# Altium PCB 智能灯.PcbDoc
Units mil, origin at the board's own origin, x right, y up, seen from the top; angles counter-clockwise.
Board outline 3937.01 x 3937.01 mil, 2 copper layers (Top Layer, Bottom Layer); 70 components, 42 nets, 334 pads, 4 vias.
Unrouted connection lines stored in the file: 1.
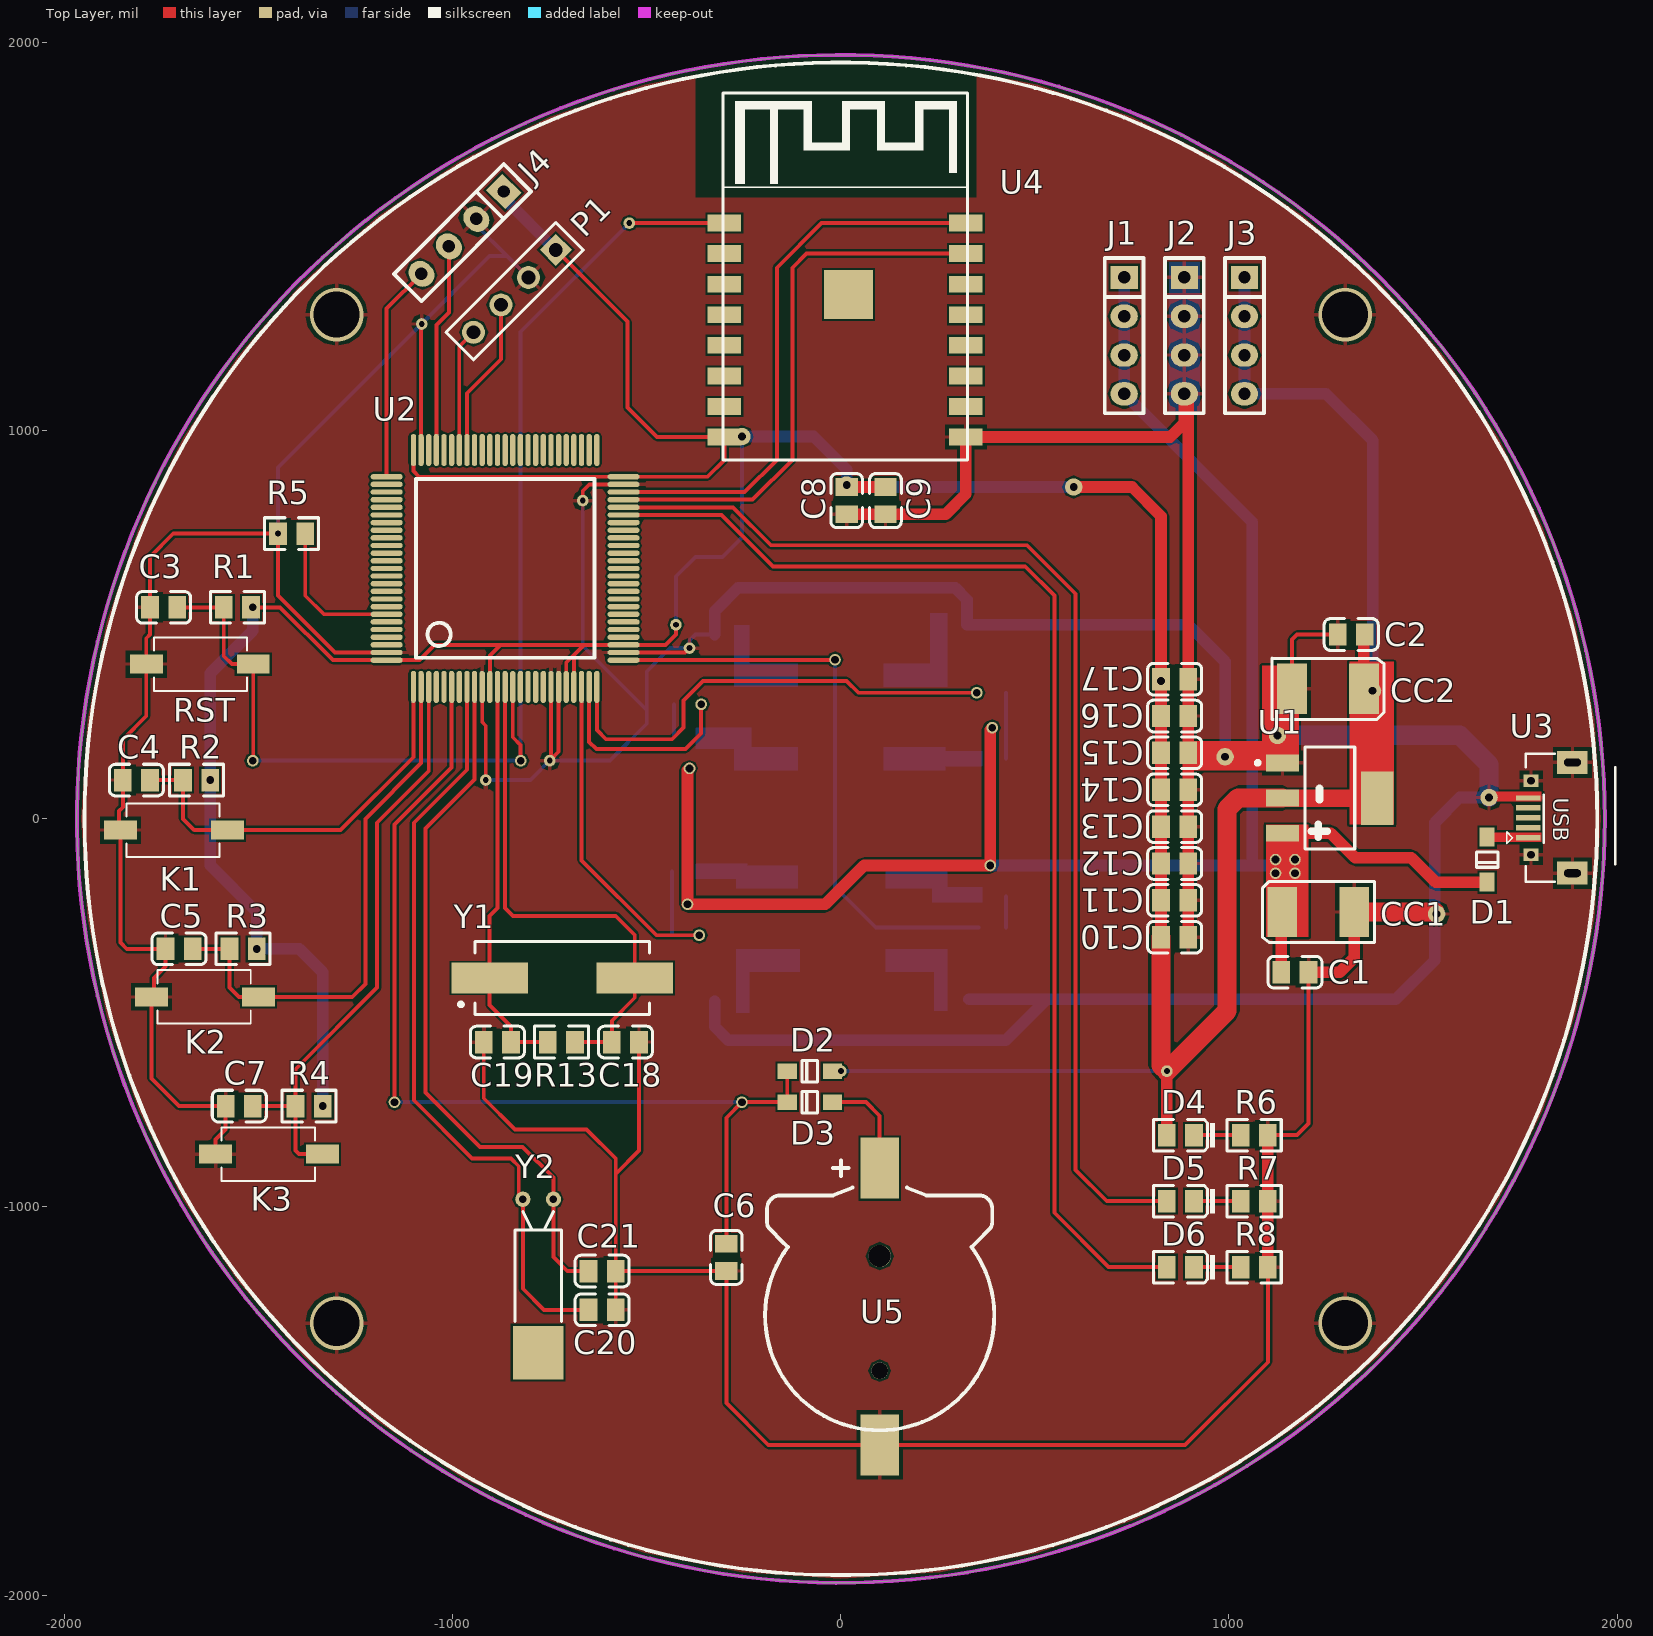
[diagram p0: Top Layer view]
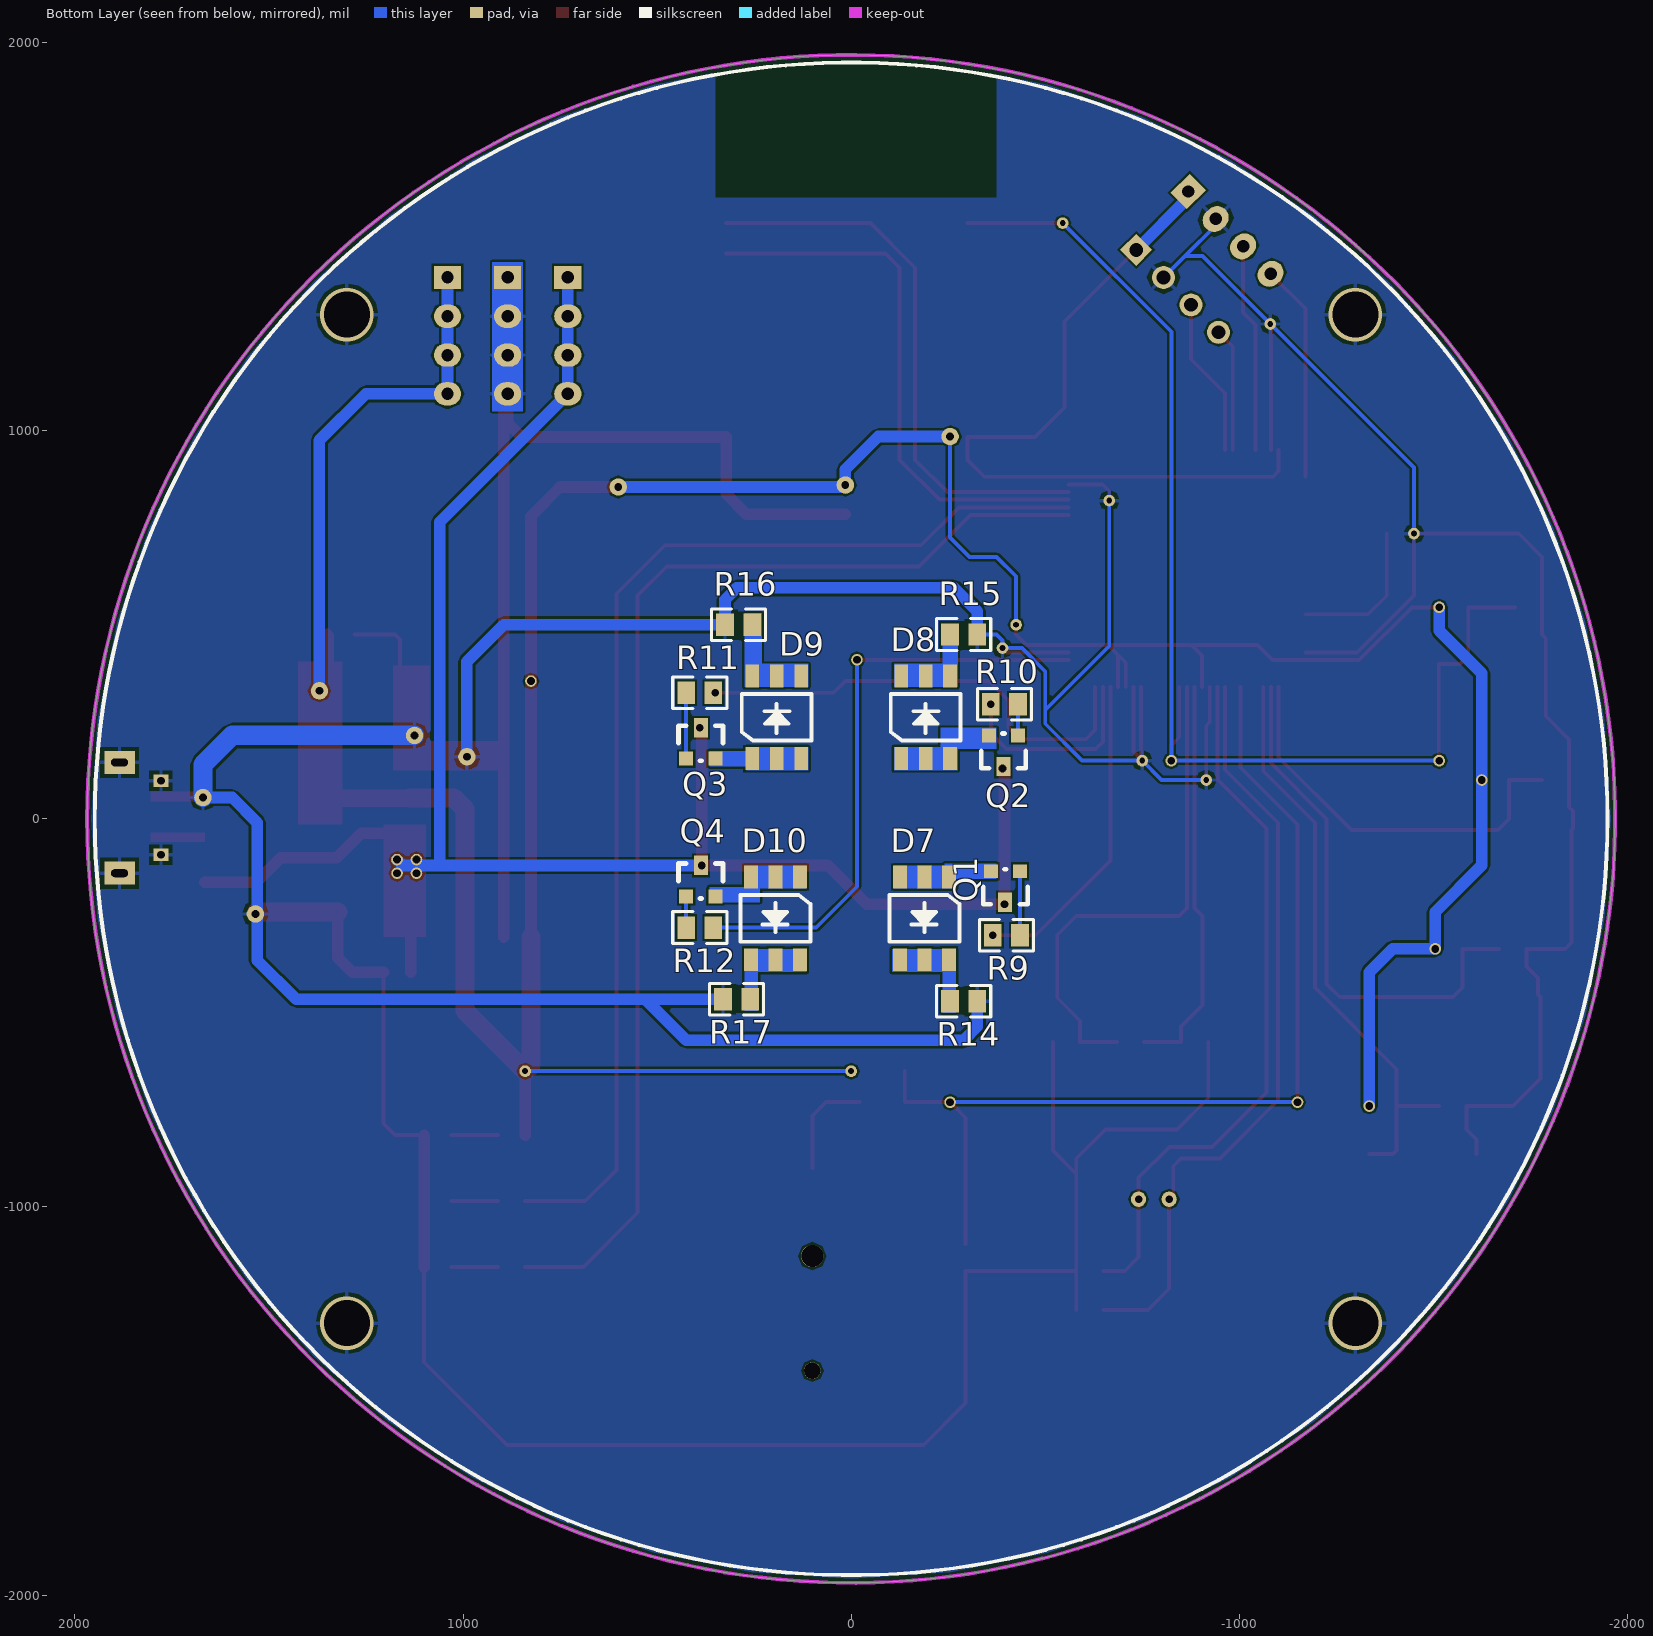
[diagram p1: Bottom Layer view, seen from below]

## Layer stack, top to bottom
Top Solder: solder mask 0.4, Solder Resist, Dk 3.5
Top Layer: signal copper 1.4
Dielectric 1: dielectric 12.6, FR-4, Dk 4.8
Bottom Layer: signal copper 1.4
Bottom Solder: solder mask 0.4, Solder Resist, Dk 3.5

## Board outline
-1968.5,0 ccw(c0,0) 0,-1968.5 ccw(c0,0) 1968.5,0 ccw(c0,0) 0,1968.5 ccw(c0,0)

## Design rules (kind name [scope] priority, off if disabled: settings)
Clearance [All] p1: gap=5
PolygonConnect [All] p1: connectstyle=Relief reliefconductorwidth=10 reliefentries=4 polygonreliefangle="90 Angle" airgapwidth=10
RoutingVias [All] p1: holewidth=28 width=50 viastyle="Through Hole" minholewidth=28 minwidth=50 maxholewidth=28 maxwidth=50
SolderMaskExpansion [All] p1: expansion=4
Width Width_2 [InNet('VUSB')] p1: maxlimit=50 minlimit=10 preferedwidth=30 minimp=50.000000 maximp=50.000000 favimp=50.000000
Width Width_1 [InNet('VCC3.3')] p2: maxlimit=50 minlimit=10 preferedwidth=10 minimp=50.000000 maximp=50.000000 favimp=50.000000
Width [InNet('GND')] p3: maxlimit=50 minlimit=10 preferedwidth=10 minimp=50.000000 maximp=50.000000 favimp=50.000000
30 further rules are at their usual default settings.

## Components (designator, comment, footprint, x,y, rotation, side; value= is the part's Value field where it differs from the comment)
C1 "104" LC-0805_C 1170,-395 r180 top
C2 "104" LC-0805_C 1315,475 r0 top
C3 "104" LC-0805_C -1745,545 r0 top
C4 "105" LC-0805_C -1815,100 r180 top
C5 "105" LC-0805_C -1705,-335 r180 top
C6 "225" LC-0805_C -295,-1130 r90 top
C7 "105" LC-0805_C -1549.96,-740 r180 top
C8 "10uF" LC-0805_C 15,820 r90 top
C9 "100nF" LC-0805_C 115,820 r90 top
C10 "104" LC-0805_C 860,-305 r180 top
C11 "104" LC-0805_C 860,-210 r180 top
C12 "104" LC-0805_C 860,-115 r180 top
C13 "104" LC-0805_C 860,-20 r180 top
C14 "104" LC-0805_C 860,75 r180 top
C15 "104" LC-0805_C 860,170 r180 top
C16 "104" LC-0805_C 860,265 r180 top
C17 "104" LC-0805_C 860,360 r180 top
C18 "22pF" LC-0805_C -555,-575 r180 top
C19 "22pF" LC-0805_C -885,-575 r180 top
C20 "22pF" LC-0805_C -615,-1265 r180 top
C21 "22pF" LC-0805_C -615,-1165 r0 top
CC1 "Cap Tan C" TAN-C-6032 1230,-240 r180 top
CC2 "Cap Tan C" TAN-C-6032 1255,335 r0 top
D1 "SS14" LC-SOD-123 1665,-105 r90 top
D2 "SS14" LC-SOD-123 -80,-650 r0 top
D3 "SS14" LC-SOD-123 -80,-730 r0 top
D4 "红灯 0805" LC-0805_LED_S1 875,-815 r180 top
D5 "蓝灯 0603" LC-0805_LED_S1 875,-985 r180 top
D6 "蓝灯 0603" LC-0805_LED_S1 875,-1155 r180 top
D7 "LED-5050" LED-5050W -253.86,-151.5 r270 bottom
D8 "LED-5050" LED-5050W -127,156.5 r90 bottom
D9 "LED-5050" LED-5050W 256.86,156.5 r90 bottom
D10 "LED-5050" LED-5050W 130,-151.5 r270 bottom
J1 "Pin HDR1X4" "Pin HDR1X4/2.54mm-S" 730,1395 r0 top
J2 "Pin HDR1X4" "Pin HDR1X4/2.54mm-S" 885,1395 r0 top
J3 "Pin HDR1X4" "Pin HDR1X4/2.54mm-S" 1040,1395 r0 top
J4 "Pin HDR1X4" "Pin HDR1X4/2.54mm-S" -868.58,1616.42 r315 top
K1 "KEY" KEY_2 -1710,-45 r180 top
K2 "KEY" KEY_2 -1630,-475 r180 top
K3 "KEY" KEY_2 -1465,-880 r180 top
P1 "Header 4" HDR1X4 -734.29,1465.71 r225 top
Q1 "NPN" SOT-23 -400,-170 r0 bottom
Q2 "NPN" SOT-23 -395,180 r0 bottom
Q3 "NPN" SOT-23 390,190 r180 bottom
Q4 "NPN" SOT-23 390,-165 r180 bottom
R1 "10KΩ" LC-0805_R -1555,545 r0 top
R2 "10KΩ" LC-0805_R -1660,100 r0 top
R3 "10KΩ" LC-0805_R -1540,-335 r0 top
R4 "10KΩ" LC-0805_R -1370,-740 r0 top
R5 "10KΩ" LC-0805_R -1415,735 r0 top
R6 "47KΩ" LC-0805_R 1065.04,-815 r0 top
R7 "47KΩ" LC-0805_R 1065.04,-985 r0 top
R8 "47KΩ" LC-0805_R 1065.04,-1155 r0 top
R9 "10KΩ" LC-0805_R -400,-300 r0 bottom
R10 "10KΩ" LC-0805_R -395,295 r0 bottom
R11 "10KΩ" LC-0805_R 390,325 r180 bottom
R12 "10KΩ" LC-0805_R 390,-280 r180 bottom
R13 "1MΩ" LC-0805_R -719.96,-575 r0 top
R14 "75Ω" LC-0805_R -290,-470 r180 bottom
R15 "75Ω" LC-0805_R -290,475 r180 bottom
R16 "75Ω" LC-0805_R 290,500 r0 bottom
R17 "75Ω" LC-0805_R 295,-465 r0 bottom
RST "RESET" KEY_2 -1660,415 r0 top
U1 "AMS1117" SOT-223 1265,65 r270 top
U2 "STM32F407VGT6" "LQFP100 14x14" -865,645 r0 top
U3 "USB" USB_B 1845,-122.28 r90 top
U4 "ESP-12S Module" "ESP-12S Module" 11.02,1259.41 r0 top
U5 "BAT" CR1220_A 100,-1280 r90 top
Y1 "8MHz" XTAL-SMD -905,-410 r0 top
Y2 "32.768KHz" OSC-3x8-WI-B -740.63,-980 r180 top

## Footprints (in the part's own frame and the unit in brackets; to place one, negate y for a bottom-side part, rotate by r counter-clockwise, add the part's x,y. Pads: shape width x height; smd on the part's side, far side on the other; paste and mask are expansions set on the pad)
CR1220_A [mm] "纽扣电池座"
  round 1.1 hole 1.1: 0(-3.6,0)
  round 1.45 hole 1.45: 0(3.9,0)
  rect 4x2.5 smd: 1(9.652,0) 2(-8.458,0)
  silkscreen extent -7.5,-7.5 10.16,7.5, body extent -9.42,-7.45 10.34,7.45, height 4.05
"ESP-12S Module" [mm]
  rect 2.2x1.1 smd: 1(-7.9,7) 2(-7.9,5) 3(-7.9,3) 4(-7.9,1) 5(-7.9,-1) 6(-7.9,-3) 7(-7.9,-5) 8(-7.9,-7) 9(7.9,-7) 10(7.9,-5) 11(7.9,-3) 12(7.9,-1) 13(7.9,1) 14(7.9,3) 15(7.9,5) 16(7.9,7)
  rect 3.2x3.2 smd: 17(0.22,2.321)
  silkscreen extent -8,-8.5 8,15.5
HDR1X4 [mm] "Connector; Header; 4 Position"
  rect 1.5x1.5 hole 0.9: 1(0,0)
  round 1.5 hole 0.9: 2(2.54,0) 3(5.08,0) 4(7.62,0)
  silkscreen extent -1.27,-1.27 8.89,1.27, body extent -1.27,-1.27 8.89,1.27, height 7.58
KEY_2 [mil] "贴片"
  rect 85x49.37 smd: 1(-129.57,-16.14) 2(146.02,-16.14)
  silkscreen extent -110,-85 130,53, body extent -110,-88 130,58
LC-0805_C [mm]
  rect 1.16x1.47 smd: 1(-0.89,0) 2(0.89,0)
  silkscreen extent -1.77,-1.04 1.77,1.04, body extent -1,-0.62 1,0.63, height 0.77
LC-0805_LED_S1 [mm]
  rect 1.16x1.47 smd: A(0.89,0) K(-0.89,0)
  silkscreen extent -2.25,-1.04 1.77,1.03, body extent -1.01,-0.62 1.01,0.62, height 1.1
LC-0805_R [mm]
  rect 1.16x1.47 smd: 1(-0.89,0) 2(0.89,0)
  silkscreen extent -1.77,-1.04 1.77,1.03, body extent -1,-0.62 1,0.63, height 0.49
LC-SOD-123 [mm]
  rect 1.25x1 smd: 1(1.475,0) 2(-1.475,0)
  silkscreen extent -0.5,-0.7 0.5,0.7, body extent -1.85,-0.77 1.85,0.78, height 1.35
LED-5050W [mil]
  rect 59.06x35.43 smd: 1(-1.5,-2) 2(211.5,-2) 3(-1.5,-65) 4(211.5,-65) 5(-1.5,-128) 6(211.5,-128)
  silkscreen extent 45,-155 165,25, body extent -1,-162 211,35, height 65
"LQFP100 14x14" [mm]
  oval 0.35x2.1 smd: 1(-6,-7.747) 2(-5.5,-7.747) 3(-5,-7.747) 4(-4.5,-7.747) 5(-4,-7.747) 6(-3.5,-7.747) 7(-3,-7.747) 8(-2.5,-7.747) 9(-2,-7.747) 10(-1.5,-7.747) 11(-1,-7.747) 12(-0.5,-7.747) 13(0,-7.747) 14(0.5,-7.747) 15(1,-7.747) 16(1.5,-7.747) 17(2,-7.747) 18(2.5,-7.747) 19(3,-7.747) 20(3.5,-7.747) 21(4,-7.747) 22(4.5,-7.747) 23(5,-7.747) 24(5.5,-7.747) 25(6,-7.747) 51(6,7.758) 52(5.5,7.758) 53(5,7.758) 54(4.5,7.758) 55(4,7.758) 56(3.5,7.758) 57(3,7.758) 58(2.5,7.758) 59(2,7.758) 60(1.5,7.758) 61(1,7.758) 62(0.5,7.758) 63(0,7.758) 64(-0.5,7.758) 65(-1,7.758) 66(-1.5,7.758) 67(-2,7.758) 68(-2.5,7.758) 69(-3,7.758) 70(-3.5,7.758) 71(-4,7.758) 72(-4.5,7.758) 73(-5,7.758) 74(-5.5,7.758) 75(-6,7.758)
  oval 2.1x0.35 smd: 26(7.752,-5.994) 27(7.752,-5.494) 28(7.752,-4.994) 29(7.752,-4.494) 30(7.752,-3.994) 31(7.752,-3.494) 32(7.752,-2.994) 33(7.752,-2.494) 34(7.752,-1.994) 35(7.752,-1.494) 36(7.752,-0.994) 37(7.752,-0.494) 38(7.752,0.006) 39(7.752,0.506) 40(7.752,1.006) 41(7.752,1.506) 42(7.752,2.006) 43(7.752,2.506) 44(7.752,3.006) 45(7.752,3.506) 46(7.752,4.006) 47(7.752,4.506) 48(7.752,5.006) 49(7.752,5.506) 50(7.752,6.006) 76(-7.752,6.006) 77(-7.752,5.506) 78(-7.752,5.006) 79(-7.752,4.506) 80(-7.752,4.006) 81(-7.752,3.506) 82(-7.752,3.006) 83(-7.752,2.506) 84(-7.752,2.006) 85(-7.752,1.506) 86(-7.752,1.006) 87(-7.752,0.506) 88(-7.752,0.006) 89(-7.752,-0.494) 90(-7.752,-0.994) 91(-7.752,-1.494) 92(-7.752,-1.994) 93(-7.752,-2.494) 94(-7.752,-2.994) 95(-7.752,-3.494) 96(-7.752,-3.994) 97(-7.752,-4.494) 98(-7.752,-4.994) 99(-7.752,-5.494) 100(-7.752,-5.994)
  silkscreen extent -5.84,-5.84 5.84,5.85, body extent -8,-7.98 8,8.03, height 1.45
OSC-3x8-WI-B [mm]
  rect 3.3x3.5 smd: 0(1,10.033)
  round 1 hole 0.5: 1(0,0) 2(2,0)
  silkscreen extent -0.52,0.8 2.52,8, body extent -0.48,-0.13 2.52,10.05, height 3.03
"Pin HDR1X4/2.54mm-S" [mil]
  rect 70x60 hole 32: 1(0,0)
  oval 70x60 hole 32: 2(0,-100) 3(0,-200) 4(0,-300)
  silkscreen extent -50,-350 50,50, body extent -50,-350 50,50, height 336
SOT-23 [mil]
  rect 36x36 smd: B(-35,-35) E(40,-35)
  rect 36x50 smd: C(3,45)
  silkscreen extent -55,-40 60,50, body extent -54,-48 60,62, height 47
SOT-223 [mm] "ASM1117系列"
  rect 1.1x2.15 smd: 1(-2.012,-3.227) 2(0.288,-3.227) 3(2.588,-3.227)
  rect 3.5x2.15 smd: 2(0.288,2.973)
  silkscreen extent -3.06,-4.98 3.64,1.5, body extent -3,-3.48 3.5,3.48, height 1.7
TAN-C-6032 [mm]
  rect 1.95x3.3 smd: 1(-2.35,0) 2(2.35,0)
  silkscreen extent -3.68,-2.01 3.66,2, body extent -3,-1.6 3,1.6, height 2.6
USB_B [mm]
  rect 0.35x1.6 smd: 1(1.875,1.884) 2(2.525,1.884) 3(3.175,1.884) 4(3.825,1.884) 5(4.475,1.884)
  rect 1.5x2 hole 0.5 slot 1.1 at 90 deg: 5(-0.45,-1.016) 5(6.8,-1.016)
  rect 0.8x1 hole 0.5: 5(0.75,1.694) 5(5.6,1.694)
  silkscreen extent -1.02,-3.81 7.37,3.28, body extent -0.83,-3.73 7.18,1.87, height 2.8
XTAL-SMD [mm]
  rect 5x2 smd: 1(0,0) 2(9.5,0)
  silkscreen extent -2,-2.4 10.45,2.4, body extent -1.95,-2.46 11.45,2.44, height 4

## Part data
C1 C2 C4 C5 C6 C7 C8 C9 C10 C11 C12 C13 C14 C15 C16 C17: library part "0805 6.8nF (682) 10% 50V", "贴片电容"
C3: library part "0805 330nF (334) 10% 50V", "贴片电容"
C18 C19 C20 C21: library part "0805 6pF (6R0) 0.25pF 50V", "贴片电容"
CC1 CC2: "Polarized Capacitor (Radial)"
D1 D2 D3: library part D
D4: library part "0805 红灯", "发光二极管"
D5 D6: library part "0603 蓝灯", "发光二极管"
K1 K2 K3: "微动开关"
P1: "Header, 4-Pin"
Q1 Q2 Q3 Q4: "NPN三极管"
R1 R13: library part "0805 390KΩ (3903) 1%", "贴片电阻"
R2 R3 R4 R6 R7 R8 R9 R10 R11 R12: library part "0805 11KΩ (1102) 1%", "贴片电阻"
R5: library part "0805 1.8KΩ (1801) 1%", "贴片电阻"
R14 R15 R16 R17: library part "0805 1.2KΩ (1201) 1%", "贴片电阻"
RST: library part KEY, "微动开关"
U1: "3.3V电压转换器AMS1117"
U2: library part STM32F103VBT6
U5: "纽扣电池座CR1220"
Y1 Y2: library part XTAL, "晶体振荡器"

## Free pads (board coordinates)
  round 30 hole 20: 2(-1625,100) 2(-1515,150) 2(-1515,545) 2(-1505,-335) 2(-1334.96,-740) 2(-1150,-730) 2(-825,150) 2(-395,-220) 2(-390,130) 2(-365,-300) 2(-360,295) 2(-255,-730) 2(-15,410) 2(350,325) 2(385,-120) 2(390,235) 2(825,355) 2(1120,-140) 2(1120,-105) 2(1170,-140) 2(1170,-105)
  round 30 hole 15: 2(-1450.04,735) 2(-1080,1275) 2(-915,100) 2(-750,150) 2(-665,820) 2(-545,1535) 2(-425,500) 2(-390,440) 2(0,-650) 2(840,-650)
  round 45 hole 20: 2(-255,985) 2(15,860) 2(600,855) 2(990,160) 2(1125,215) 2(1370,330) 2(1535,-245) 2(1670,55)

## Via types
v1: diameter 137.8, hole 118.11, Top Layer to Bottom Layer, 4 vias

## Nets (pads, with @x,y where several pads share a name; then routed paths per layer and width w, separated by ;. In a path a pad name is that pad's centre, name@x,y a point inside that pad or via, vN(x,y) a via of type N, cw(c..) or ccw(c..) an arc to the next point about the centre after c; other vN are vias at no path point)
DS1: pad.2@-365,-300 R9.2 U2.23 | length 830
  Top Layer w10: U2.23 -668.15,-106.85 -475,-300 pad.2@-365,-300
DS2: pad.2@-360,295 R10.2 U2.24 | length 529.2
  Top Layer w10: U2.24 -648.46,198.46 -630,180 -400,180 -360,220 pad.2@-360,295
DS3: pad.2@350,325 R11.2 U2.25 | length 1215.4
  Top Layer w10: U2.25 -628.78,228.78 -605,205 -435,205 -405,235 -405,305 -355,355 15,355 45,325 pad.2@350,325
DS4: pad.2@-15,410 R12.2 U2.26 | length 1543.2
  Top Layer w10: U2.26 pad.2@-15,409
  Bottom Layer w10: pad.2@-15,410 -15,-175 90,-280 R12.2
GND: C1.1 C2.1 C3.1 C4.2 C5.2 C6.1 C7.2 C8.1 C9.1 C10.1 C11.1 C12.1 C13.1 C14.1 C15.1 C16.1 C17.1 C18.1 C19.2 C20.1 C21.2 CC1.1 CC2.1 J2.1 J2.2 J2.3 J2.4 J4.2 K1.2 K2.2 K3.2 P1.2 pad.2@990,160 pad.2@1125,215 pad.2@1535,-245 pad.2@1670,55 pad.2@-390,440 pad.2@-665,820 pad.2@-750,150 pad.2@-915,100 pad.2@-1080,1275 pad.2@-1450.04,735 R5.1 R6.2 R7.2 R8.2 R14.2 R15.2 R16.2 R17.2 RST.1 U1.1 U2.10 U2.19 U2.20 U2.27 U2.49 U2.74 U2.99 U3.5 U4.9 U4.17 U5.2 | length 19575.1
  Top Layer w10: K3.2 -1611.02,-826.02 -1585,-800 C7.2 -1705,-740 -1776.02,-668.98 K2.2 -1770,-452.83 -1770,-410 -1740.04,-380.04 C5.2 -1840,-335 -1856.02,-318.98 K1.2 -1860,-24.88 -1860,20 -1850.04,29.96 C4.2 -1850.04,204.96 -1789.57,265.43 RST.1 -1789.57,465.43 -1780.04,474.96 C3.1 -1780.04,674.96 -1720,735 R5.1 -1450.04,575.04 -1303.69,428.69 U2.99 ; U2.74 -1081.54,1273.46 pad.2@-1080,1275 ; U2.10 -924.06,249.06 -915,240 pad.2@-915,100 ; C19.2 -920.04,-719.96 -840,-800 -655,-800 -579.96,-875.04 -579.96,-914.96 ; pad.2@-750,150 pad.2@-746.89,153.11 ; U2.19 pad.2@-746.89,153.11 ; U2.20 -727.2,172.8 pad.2@-746.89,153.11 ; pad.2@-665,820 -665,845 -648.24,861.76 U2.49 ; C20.1 C21.2 ; U2.27 -401.31,428.69 pad.2@-390,440 ; C18.1 -519.96,-854.96 -579.96,-914.96 ; R8.2 1100.08,-1399.92 887,-1613 U5.2 -187,-1613 -295,-1505 C6.1 C6.1 C21.2 ; R6.2 1175,-815 1205.04,-784.96 C1.1 ; CC2.1 1162.48,462.48 1175,475 C2.1 ; C21.2 -579.96,-914.96
  Top Layer w30: C8.1 C9.1 269.96,784.96 322.05,837.05 U4.9 848.82,983.82 885,1020 J2.4 895.04,1084.96 C17.1 C16.1 C15.1 C14.1 C13.1 C12.1 C11.1 C10.1 ; R8.2 R7.2 R6.2 ; C1.1 1285,-395 1322.52,-357.48 CC1.1 ; pad.2@1530,-240 pad.2@1535,-245
  Top Layer w50: CC1.1 pad.2@1530,-240
  Bottom Layer w10: pad.2@-1450.04,735 -1450.04,904.96 -1080,1275 -905,1450 -860,1450 ; J4.2 -939.29,1529.29 -860,1450 ; pad.2@-915,100 -800,100 -750,150 -595,150 -500,245 -500,280 ; P1.2 -860,1450 ; pad.2@-665,820 -665,445 -500,280 ; R15.2 -375,475 -390,460 -390,440 -440,440 -500,380 -500,280
  Bottom Layer w30: R14.2 -325.04,-534.96 -290,-570 425,-570 530,-465 ; R15.2 -325.04,534.96 -265,595 295,595 325.04,564.96 R16.2 895,500 990,405 pad.2@990,160 ; R17.2 530,-465 ; pad.2@1670,55 1595,55 1530,-10 1530,-365 1430,-465 530,-465
  Bottom Layer w50: pad.2@1125,215 1595,215 1670,140 pad.2@1670,55
  other v1: -1299.21,-1299.21 1299.21,-1299.21 -1299.21,1299.21 1299.21,1299.21
KEY1: C4.1 K1.1 R2.1 U2.1 | length 1049.6
  Top Layer w10: C4.1 R2.1 -1695.04,0.04 -1666.14,-28.86 K1.1 -1288.86,-28.86 -1101.22,158.78 U2.1
KEY2: C5.1 K2.1 R3.1 U2.2 | length 1393.3
  Top Layer w10: C5.1 R3.1 -1575.04,-434.96 -1551.14,-458.86 K2.1 -1258.86,-458.86 -1225,-425 -1225,0 -1081.54,143.46 U2.2
KEY3: C7.1 K3.1 R4.1 U2.3 | length 1520.3
  Top Layer w10: C7.1 R4.1 ; K3.1 -1396.14,-863.86 -1405.04,-854.96 R4.1 ; U2.3 -1061.85,123.15 -1195,-10 -1195,-435 -1405.04,-645.04 R4.1
LED1: D5.A U2.46 | length 3010.1
  Top Layer w10: U2.46 -277.7,802.7 -180,705 480,705 605,580 605,-905 685,-985 D5.A
LED2: D6.A U2.45 | length 3133.9
  Top Layer w10: U2.45 -308.02,783.02 -175,650 475,650 550,575 550,-1015 690,-1155 D6.A
NetD1_1: D1.1 U3.1
NetD3_1: D3.1 U5.1 | length 271.4
  Top Layer w10: D3.1 65,-730 100,-765 U5.1
NetD4_K: D4.K R6.1 | length 120
  Top Layer w10: D4.K R6.1
NetD5_K: D5.K R7.1 | length 120
  Top Layer w10: D5.K R7.1
NetD6_K: D6.K R8.1 | length 120
  Top Layer w10: D6.K R8.1
NetD7_1: D7.1 D7.3 D7.5 Q1.E
NetD7_2: D7.2 D7.4 D7.6 R14.1
NetD8_1: D8.1 D8.3 D8.5 Q2.E
NetD8_2: D8.2 D8.4 D8.6 R15.1
NetD9_1: D9.1 D9.3 D9.5 Q3.E
NetD9_2: D9.2 D9.4 D9.6 R16.1
NetD10_1: D10.1 D10.3 D10.5 Q4.E
NetD10_2: D10.2 D10.4 D10.6 R17.1
NetQ1_B: Q1.B R9.1 | length 165
  Bottom Layer w10: R9.1 R9.1 Q1.B
NetQ2_B: Q2.B R10.1 | length 80
  Bottom Layer w10: R10.1 Q2.B Q2.B
NetQ3_B: Q3.B R11.1 | length 170
  Bottom Layer w10: Q3.B Q3.B R11.1
NetQ4_B: Q4.B R12.1 | length 80
  Bottom Layer w10: Q4.B R12.1 R12.1
NetR5_2: R5.2 U2.94 | length 389.6
  Top Layer w10: R5.2 -1379.96,574.96 -1332.11,527.11 U2.94
NRST: C3.2 pad.2@-545,1535 pad.2@-825,150 pad.2@-1515,150 R1.1 RST.2 U2.14 U4.1 | length 3213.4
  Top Layer w10: C3.2 R1.1 -1590.04,420.04 -1568.86,398.86 RST.2 -1513.98,151.02 pad.2@-1515,150 ; U2.14 -845.31,210.31 -825,190 pad.2@-825,150 ; pad.2@-545,1535 U4.1
  Bottom Layer w10: pad.2@-1515,150 -825,150 -825,1255 pad.2@-545,1535
OSC32_IN: C20.2 U2.8 Y2.2 | length 1973.9
  Top Layer w10: U2.8 -963.43,126.57 -1100,-10 -1100,-725 -950,-875 -850,-875 -830,-895 -830,-969.37 Y2.2 -819.37,-1210.63 -765,-1265 C20.2
OSC32_OUT: C21.1 U2.9 Y2.1 | length 1828.2
  Top Layer w10: U2.9 -943.74,101.89 -943.43,101.57 -1070,-25 -1070,-705 -930,-845 -820,-845 -740.63,-924.37 Y2.1 -740.63,-1129.37 -705,-1165 C21.1
OSC_IN: C19.1 R13.1 U2.12 Y1.1 | length 1041.2
  Top Layer w10: U2.12 -884.69,-229.69 -905,-250 Y1.1 -905,-480 -849.96,-535.04 C19.1 R13.1
OSC_OUT: C18.2 R13.2 U2.13 Y1.2 | length 1327.9
  Top Layer w10: U2.13 -865,-230 -845,-250 -580,-250 -530.99,-299.01 Y1.2 -530.99,-460.99 -590.04,-520.04 C18.2 R13.2
SWCLK: J4.4 U2.76 | length 559.9
  Top Layer w10: U2.76 -1170.21,1314.79 J4.4
SWDIO: J4.3 U2.72 | length 537.9
  Top Layer w10: U2.72 -1042.17,1272.83 -1010,1305 J4.3
U1_RX: P1.4 U2.69 | length 318.3
  Top Layer w10: U2.69 -983.11,1216.89 P1.4
U1_TX: P1.3 U2.68 | length 410.2
  Top Layer w10: U2.68 -963.43,1096.57 -875.71,1184.29 P1.3
U3_RX: U2.48 U4.16 | length 1458.8
  Top Layer w10: U2.48 -247.93,842.07 -165,925 -165,1420 -50,1535 U4.16
U3_TX: U2.47 U4.15 | length 1434.4
  Top Layer w10: U2.47 -227.61,822.39 -125,925 -125,1420 -88.74,1456.26 U4.15
VBAT: C6.2 D2.2 D3.2 pad.2@-255,-730 pad.2@-1150,-730 U2.6 | length 2589.4
  Top Layer w10: pad.2@-1150,-730 -1150,-15 -1002.8,132.2 U2.6 ; C6.2 -295,-770 -255,-730 D3.2 D2.2
  Bottom Layer w10: -1135,-730 pad.2@-255,-730
VCC3.3: C2.2 C8.2 C9.2 C10.2 C11.2 C12.2 C13.2 C14.2 C15.2 C16.2 C17.2 CC2.2 D2.1 D4.A J3.1 J3.2 J3.3 J3.4 J4.1 P1.1 pad.2@0,-650 pad.2@15,860 pad.2@600,855 pad.2@825,355 pad.2@840,-650 pad.2@1370,330 pad.2@-255,985 pad.2@-425,500 pad.2@-1334.96,-740 pad.2@-1505,-335 pad.2@-1515,545 pad.2@-1625,100 R1.2 R2.2 R3.2 R4.2 U1.2 U2.11 U2.21 U2.22 U2.28 U2.50 U2.75 U2.100 U4.8 | length 11642.3
  Top Layer w10: R1.2 -1445,545 -1309,409 U2.100 -1086,409 -1046.63,448.37 -876.63,448.37 ; U2.75 -1101.22,896.22 -1086.44,881.44 U2.50 -343.56,881.44 -300,925 U4.8 -473.82,983.82 -550,1060 -550,1281.42 P1.1 ; U2.11 -904.37,420.63 -876.63,448.37 ; U2.21 -707.52,402.48 -687.83,422.17 ; U2.22 -687.83,422.17 ; pad.2@-425,500 -425,475 -451.63,448.37 U2.28 -661.63,448.37 ; -876.63,448.37 -661.63,448.37 ; -687.83,422.17 -661.63,448.37
  Top Layer w30: C8.2 C9.2 ; pad.2@600,855 750,855 824.96,780.04 C17.2 C16.2 C15.2 C14.2 C13.2 C12.2 C11.2 C10.2 ; D4.A 839.96,-650.04 pad.2@840,-650 ; CC2.2 1347.52,472.48 C2.2
  Top Layer w50: C10.2 824.96,-635.04 pad.2@839.96,-650.04 ; pad.2@840,-650 995,-495 995,25 1023.66,53.66 U1.2@1137.95,53.66
  Bottom Layer w10: pad.2@-425,500 -425,625 -375,675 -305,675 -255,725 pad.2@-255,985 ; pad.2@0,-650 pad.2@840,-650
  Bottom Layer w30: pad.2@-1515,545 -1515,485 -1625,375 -1625,100 -1625,-120 -1505,-240 -1505,-335 -1395,-335 -1334.96,-395.04 pad.2@-1334.96,-740 ; J4.1 -868.58,1600 P1.1 ; pad.2@-255,985 -70,985 15,900 15,860 20,855 pad.2@600,855 ; J3.1 J3.2 J3.3 J3.4 1250,1095 1370,975 pad.2@1370,330
VUSB: C1.2 CC1.2 D1.2 J1.1 J1.2 J1.3 J1.4 pad.2@385,-120 pad.2@390,235 pad.2@1120,-105 pad.2@1120,-140 pad.2@1170,-105 pad.2@1170,-140 pad.2@-390,130 pad.2@-395,-220 Q1.C Q2.C Q3.C Q4.C U1.3 | length 4910.1
  Top Layer w30: pad.2@-390,130 -395,125 -395,-220 -40,-220 60,-120 385,-120 385,230 pad.2@390,235 ; C1.2 1134.96,-242.52 CC1.2 1137.48,-37.36 U1.3 1261.89,-36.89 1325,-100 1470,-100 1533.07,-163.07 D1.2
  Bottom Layer w30: Q4.C 1060,-120 ; J1.1 J1.2 J1.3 J1.4 1060,765 1060,-120 ; pad.2@1170,-105 1155,-120 1060,-120
pads on no net: U2.4 U2.5 U2.7 U2.15 U2.16 U2.17 U2.18 U2.29 U2.30 U2.31 U2.32 U2.33 U2.34 U2.35 U2.36 U2.37 U2.38 U2.39 U2.40 U2.41 U2.42 U2.43 U2.44 U2.51 U2.52 U2.53 U2.54 U2.55 U2.56 U2.57 U2.58 U2.59 U2.60 U2.61 U2.62 U2.63 U2.64 U2.65 U2.66 U2.67 U2.70 U2.71 U2.73 U2.77 U2.78 U2.79 U2.80 U2.81 U2.82 U2.83 U2.84 U2.85 U2.86 U2.87 U2.88 U2.89 U2.90 U2.91 U2.92 U2.93 U2.95 U2.96 U2.97 U2.98 U3.2 U3.3 U3.4 U4.2 U4.3 U4.4 U4.5 U4.6 U4.7 U4.10 U4.11 U4.12 U4.13 U4.14 U5.0 Y2.0

## Polygon pours and split planes (outlines as drawn)
GND on Top Layer "NONET_L-01_P-001" (solid, remove dead copper, pour order 0): -1230,1540 -1400,1370 -1420,1370 -1438.63,1343.63 -1495,1275 -1570,1185 -1700,985 -1745,915 -1815.62,760.62 -1870,615 -1895,532.9 -1940,330 -1947.2,288.84 -1965,95 -1965,-115 -1913.23,-463.23 -1895,-535 -1831.05,-698.95 -1790,-815 -1745,-911.03 -1675,-1035 -1640,-1095 -1495,-1280 -1325.4,-1455.44 -1142.26,-1607.22 -1105,-1630 -917.6,-1744.58 -815,-1790 -719.02,-1832.49 -620,-1870 -535.82,-1894.18 -370,-1935 -325.24,-1941.45 -137.48,-1968.5 50,-1970 400.48,-1930.94 490,-1905 640.48,-1861.4 760,-1815 872.36,-1764.65 1020,-1680 1078.55,-1646.74 1345,-1440 1513.47,-1258.73 1530,-1235 1659.69,-1064.83 1700,-990 1776.36,-848.26 1825,-730 1870.46,-613.51 1925,-420 1931.42,-380.28 1965,10 1931.42,380.28 1920,450 1860.39,643.4 1810,780 1756.67,888.32 1635,1100 1604.87,1139.91 1360,1425 1078.55,1653.55 1005,1695 860.65,1776.36 785,1810 710.87,1842.97 625,1870 560.59,1886.99 465,1915 400.49,1927.33 210,1960 205,1965 -160,1965 -410.36,1931.17 -480,1910 -644.95,1859.85 -750,1820 -848.26,1776.36 -970,1715
GND on Bottom Layer "NONET_L-01_P-001" (solid, remove dead copper, pour order 4): 5,1970 0.54,1965.54 -74.8,1965.54 -164.46,1965.54 -170,1960 -195,1960 -270,1950 -320,1940 -345,1940 -365.93,1933.03 -425,1925 -475,1910 -495,1910 -510.32,1901.2 -555,1895 -574.35,1882.85 -595,1880 -610.47,1871.45 -640,1865 -658.77,1855 -670,1855 -691.19,1843.17 -710,1835 -740.69,1820.69 -765,1815 -795.31,1800.69 -830,1790 -854.9,1774.9 -900,1750 -930.07,1734.93 -950,1725 -965,1725 -985,1705 -1010,1680 -1025,1680 -1040,1680 -1055,1665 -1075,1645 -1085,1645 -1100,1645 -1120,1625 -1140,1605 -1155,1605 -1175,1585 -1195,1565 -1200,1565 -1205,1565 -1230,1540 -1270,1500 -1280,1500 -1285,1500 -1360,1425 -1480,1305 -1515,1250 -1540,1220 -1555,1205 -1629.39,1104.58 -1650,1075 -1710.06,975.04 -1735,930 -1777.4,852.4 -1795,810 -1825.98,735.39 -1850,675 -1874.76,600.24 -1905,500 -1915.19,455.04 -1935,350 -1945.5,300.08 -1965,160 -1970,155 -1970,-75 -1935,-350 -1925,-405 -1874.85,-599.95 -1840,-695 -1809.6,-774.83 -1775,-850 -1717.7,-961.51 -1605,-1140 -1575.63,-1180 -1345,-1440 -1190.51,-1567.71 -1165,-1585 -1015.73,-1686.21 -970,-1715 -841.93,-1775.36 -760,-1815 -708.33,-1840 -640,-1860 -580,-1881.12 -475,-1910 -425,-1925 -285,-1950 -264.41,-1950.66 5,-1968.5 276.64,-1950 292.01,-1950 310,-1945 375.07,-1935.25 405,-1925 499.16,-1904.16 555,-1885 644.52,-1860 700,-1840 756.9,-1817.17 810,-1795 850.36,-1775.36 915,-1745 939.82,-1729.67 995,-1695 1034.75,-1674.6 1130,-1610 1167.38,-1585 1325,-1460 1575.63,-1180 1600,-1140 1659.1,-1059.43 1675,-1030 1733.19,-933.19 1765,-870 1797.67,-797.67 1830,-720 1852.04,-667.04 1880,-565 1899.95,-514.95 1920,-435 1929.5,-389.9 1960,-170 1960,220 1955,225 1920,434.29 1910,485 1864.97,629.99 1835,720 1781.79,836.79 1695,1000 1659.1,1059.43 1490,1285 1290,1485 1290,1495 1045,1668.23 970,1715 795.31,1800.69 670,1850 485,1910 249.69,1952.6 24.28,1965.54

## Keep-outs
Keep-Out Layer:
  circle w10: c0,0 r1968.5

## Other copper
Top Layer:
  rectangle net GND: 880,125 1180,200
  rectangle net GND: 1660,45 1805,70
  rectangle net GND: 1085,125 1180,395
  rectangle net VCC3.3: 1310,-15 1425,405
  rectangle net VCC3.3: 1095,30 1425,75
  rectangle net VUSB: 1095,-305 1205,-15
  rectangle net NetD1_1: 1665,-60 1805,-35
  pour cut-out: -375,1910 -375,1600 350,1600 350,1915 295,1925 40,1950 -209.74,1938.49 -230,1935
Bottom Layer:
  rectangle net NetD8_2: -275,340 -235,500
  rectangle net NetD7_2: -270,-500 -235,-335
  rectangle net NetD10_2: 240,-495 275,-335
  rectangle net NetD8_2: -270,340 -110,400
  rectangle net NetD8_1: -275,125 -110,185
  rectangle net NetD7_2: -270,-395 -105,-335
  rectangle net NetD7_1: -270,-180 -110,-120
  rectangle net NetD10_1: 115,-180 275,-120
  rectangle net NetD10_2: 115,-395 275,-335
  rectangle net NetD9_2: 230,340 275,530
  rectangle net NetD9_2: 110,340 275,400
  rectangle net NetD9_1: 240,135 365,175
  rectangle net NetD9_1: 110,125 270,185
  rectangle net GND: 845,1050 925,1435
  rectangle net NetD10_1: 235,-215 365,-175
  rectangle net NetD7_1: -375,-155 -240,-115
  rectangle net NetD8_1: -375,180 -230,235
  pour cut-out: -375,1930 -375,1600 350,1600 350,1940 279.79,1948.52 234.93,1954.43 30,1968.5 -179.59,1962.57 -195,1960

## Silkscreen, mask and mechanical layers (free items; w line width, h text height)
Top Overlay:
  circle w10: c0,0 r1948.82
Bottom Overlay:
  circle w10: c0,0 r1948.82